# EAGLE board MainBoard 1.8.0 (EAGLE 9.6.2)
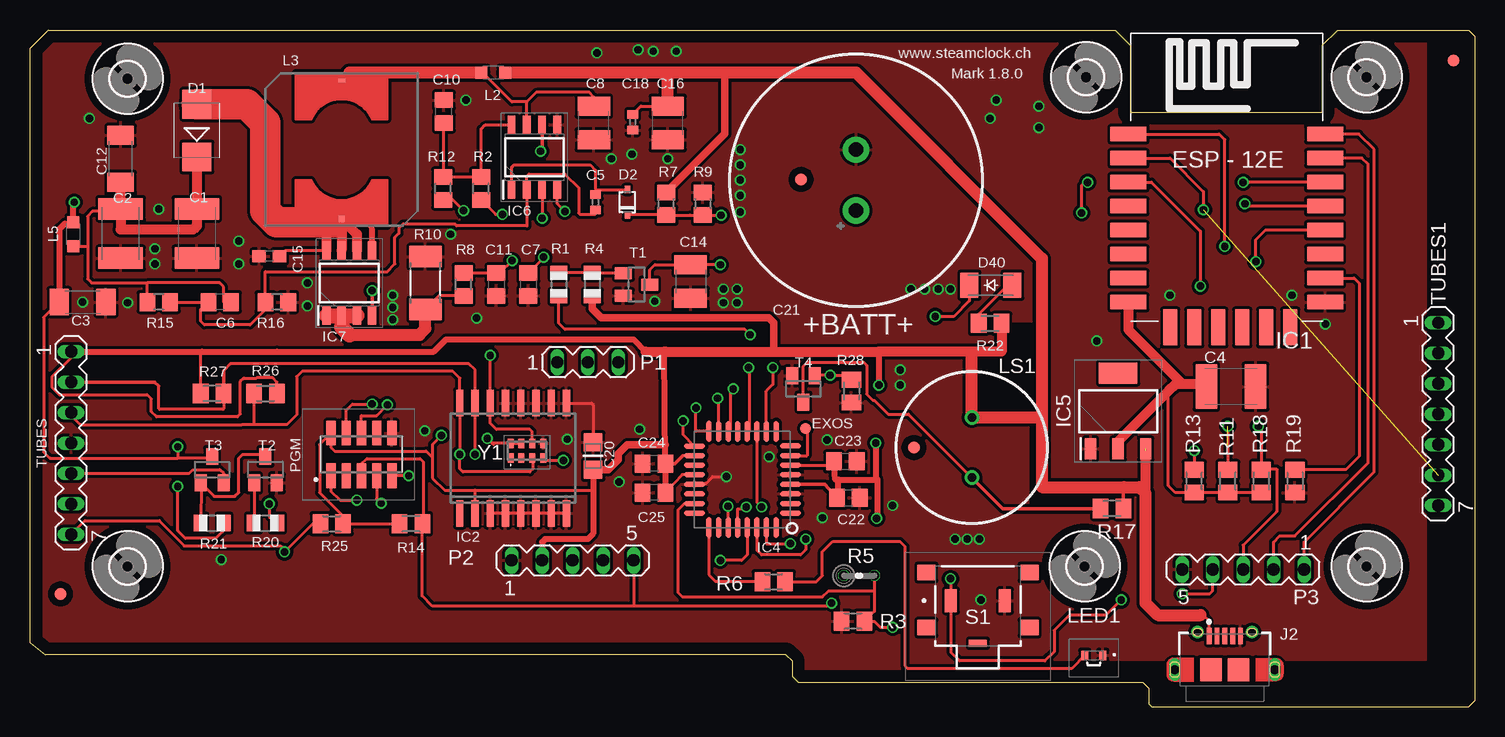
[diagram p0: board, top side]
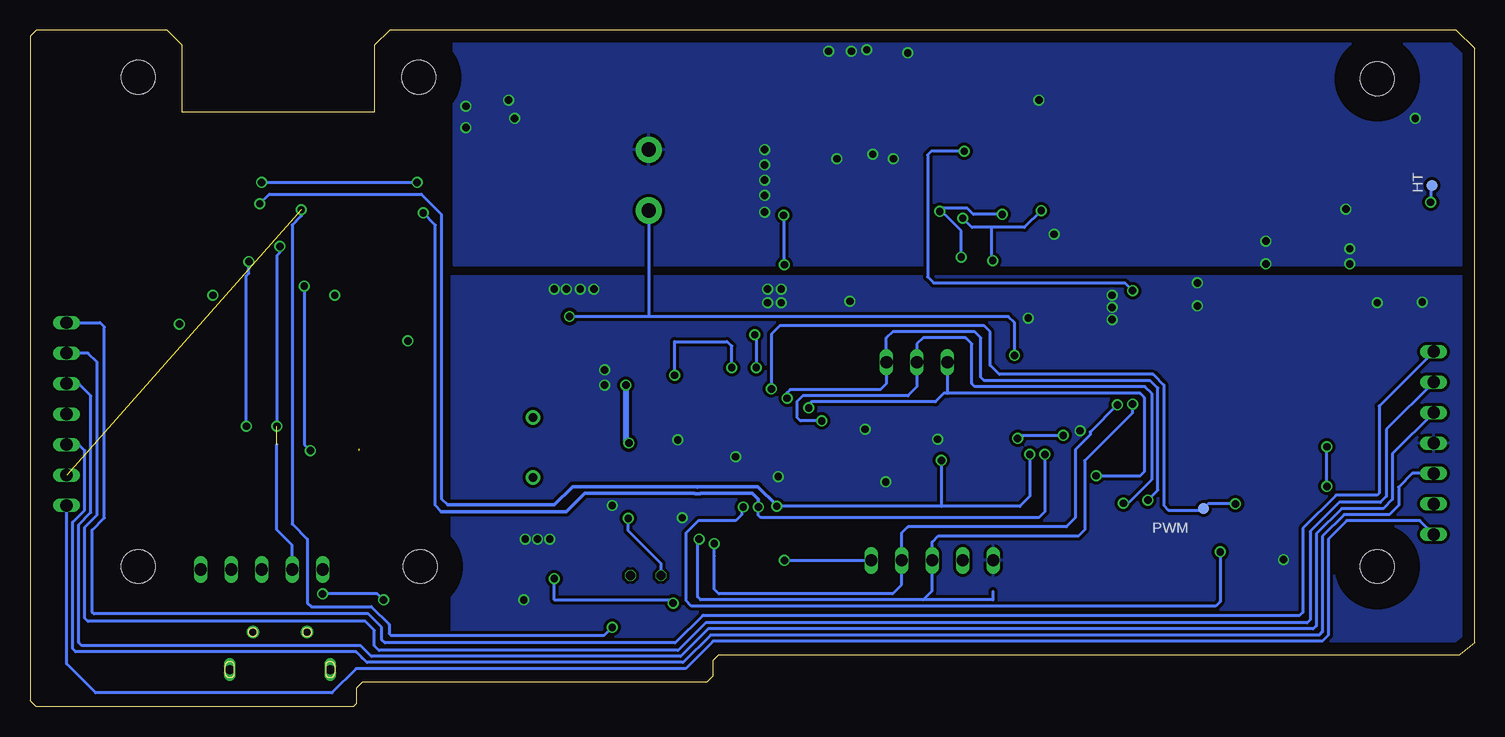
[diagram p1: board, bottom side, seen from below]

Size 120.4 x 56.39 mm. Coordinates in mm from the lower left corner, seen from the top.
Outline: 1.52,56.39 90.42,56.39 91.69,55.12 91.69,49.53 107.7,49.53 107.7,55.12 108.97,56.39 119.89,56.39 120.4,55.88 120.4,0.51 119.89,0 93.47,0 93.22,0.25 93.22,1.52 92.71,2.03 64.01,2.03 63.5,2.54 63.5,3.81 62.99,4.32 1.27,4.32 0,5.33 0,54.86 1.52,56.39
Copper layers (1*16): Top 0.035mm / dielectric 1.5mm / Bottom 0.035mm
Design rules "default *": minimum track width 10mil, minimum drill 24mil, track to track 4mil, track to pad 1mil, pad to pad 1mil, via to via 8mil, smd to smd 8mil, copper to edge 40mil, drill to drill 8mil, minimum pad ring 1mil, minimum via ring 3mil, stop-mask expansion 4mil, vias tented up to drill 0mil, thermal gap 10mil
Net classes: 0 default: width 0.254 mm, clearance 0.254 mm; 1 pwr: width 0.254 mm, clearance 0.356 mm

## Footprints (pad centres in the part's own frame; a part is rotated, then mirrored left to right if it is on the bottom)
C1812K = smd 1.8 x 3.7: 1 -2.05,0; 2 2.05,0
C1808 = smd 1.6 x 2.2: 1 -1.95,0; 2 1.95,0
C0402 = smd 0.7 x 0.9: 1 -0.65,0; 2 0.65,0
C0805 = smd 1.3 x 1.5: 1 -0.95,0; 2 0.95,0
C1210 = smd 1.6 x 2.7: 1 -1.4,0; 2 1.4,0
C0603 = smd 1.1 x 1: 1 -0.85,0; 2 0.85,0
CAP0805-NP = smd 1.524 x 1.524: 1 0,0; 2 2.286,0
ELNA21.5X8.0 = drill 1.2 pad 2.184: + -2.54,0; - 2.54,0
SMB = smd 2.4 x 2.4: A 2.2,0; C -2.2,0
SOD323 = smd 0.6 x 0.45: A 1.06,0; C -1.06,0
SOD-123_MINI-SMA = smd 1.5 x 2.1: A 1.8,0; C -1.8,0
TP09R = smd 0.9 x 0.9: TP 0,0
2,8 = hole 2.8: 0,0
ESP12E-SMD = smd 3 x 1.2: ADC -8.3,3.8; CH_PD -8.3,1.8; GND 8.1,-8.2; GPIO0 8.1,-2.2; GPIO2 8.1,-4.2; GPIO4 8.1,-0.2; GPIO5 8.1,1.8; GPIO12 -8.3,-4.2; GPIO13 -8.3,-6.2; GPIO14 -8.3,-2.2; GPIO15 8.1,-6.2; GPIO16 -8.3,-0.2; RESET -8.3,5.8; RXD0 8.1,3.8; TXD0 8.1,5.8; VCC -8.3,-8.2 | smd 1.2 x 3: CS0 -4.8,-10.3; GPIO9 -0.8,-10.3; GPIO10 1.2,-10.3; MISO -2.8,-10.3; MOSI 3.2,-10.3; SCLK 5.2,-10.3
SO16W = smd 0.6 x 2.2: 1 -4.445,-4.6; 2 -3.175,-4.6; 3 -1.905,-4.6; 4 -0.635,-4.6; 5 0.635,-4.6; 6 1.905,-4.6; 7 3.175,-4.6; 8 4.445,-4.6; 9 4.445,4.6; 10 3.175,4.6; 11 1.905,4.6; 12 0.635,4.6; 13 -0.635,4.6; 14 -1.905,4.6; 15 -3.175,4.6; 16 -4.445,4.6
QFP032 = smd 0.432 x 1.778: 1 0,0; 2 0.8,0; 3 1.599,0; 4 2.399,0; 5 3.199,0; 6 3.998,0; 7 4.798,0; 8 5.598,0; 17 5.588,8.001; 18 4.798,7.997; 19 3.998,7.997; 20 3.199,7.997; 21 2.399,7.997; 22 1.599,7.997; 23 0.799,7.997; 24 0,7.997 | smd 1.778 x 0.432: 9 6.807,1.194; 10 6.807,2.007; 11 6.807,2.794; 12 6.807,3.607; 13 6.807,4.394; 14 6.807,5.182; 15 6.807,5.994; 16 6.816,6.803; 25 -1.194,6.807; 26 -1.194,5.994; 27 -1.194,5.182; 28 -1.194,4.394; 29 -1.194,3.607; 30 -1.194,2.794; 31 -1.194,2.007; 32 -1.194,1.194
SOT230P700X180-4N = smd 1.75 x 0.95: 1 -3.15,2.3; 2 -3.15,0; 3 -3.15,-2.3 | smd 1.75 x 3.2: 4 3.15,0
SOIC127P600X175-8N = smd 1.525 x 0.65: 1 -2.712,1.905; 2 -2.712,0.635; 3 -2.712,-0.635; 4 -2.712,-1.905; 5 2.712,-1.905; 6 2.712,-0.635; 7 2.712,0.635; 8 2.712,1.905
SOIC127P600X175-8N' = smd 1.525 x 0.7: 1 -2.712,1.905; 2 -2.712,0.635; 3 -2.712,-0.635; 4 -2.712,-1.905; 5 2.712,-1.905; 6 2.712,-0.635; 7 2.712,0.635; 8 2.712,1.905
629105150921 = smd 0.4 x 1.35: 1 -1.3,2.335; 2 -0.65,2.335; 3 0,2.335; 4 0.65,2.335; 5 1.3,2.335 | drill 0.65 pad 1.05: S1 -2.26,2.65; S2 2.26,2.65 | drill 0.75 pad 0.95 long: S3 -4.175,-0.47; S6 4.175,-0.47 | smd 1.8 x 1.9: S4 -1.15,-0.47; S5 1.15,-0.47
L2012C = smd 1 x 1: 1 -1,0; 2 1,0
MSS7341 = smd 0.61 x 0.305: 1 0,5.765 | smd 0.5 x 0.5: 2 0,-5.765
SMLA15YTT86 = smd 0.6 x 0.8: 1 -0.75,-0.205; 2 0.75,-0.205
PKM13EPYH4002-B0 = drill 0.7 pad 1.2: 1 -2.5,0; 2 2.5,0
MA03-1 = drill 1.016 long: 1 -2.54,0; 2 0,0; 3 2.54,0
MA05-1 = drill 1.016 long: 1 -5.08,0; 2 -2.54,0; 3 0,0; 4 2.54,0; 5 5.08,0
2002132100010C4LF = smd 0.76 x 2.05: 1 2.54,1.775; 2 2.54,-1.775; 3 1.27,1.775; 4 1.27,-1.775; 5 0,1.775; 6 0,-1.775; 7 -1.27,1.775; 8 -1.27,-1.775; 9 -2.54,1.775; 10 -2.54,-1.775
R0805 = smd 1.1 x 1.4: 1 -1,0; 2 1,0
R0805' = smd 1.3 x 1.5: 1 -0.95,0; 2 0.95,0
M2012 = smd 1.3 x 1.6: 1 -0.95,0; 2 0.95,0
0204V = drill 0.813 octagon: 1 -1.27,0; 2 1.27,0
R2010 = smd 1.8 x 2.7: 1 -2.2,0; 2 2.2,0
M0805 = smd 1.3 x 1.6: 1 -0.95,0; 2 0.95,0
TL3336AF160Q = smd 1 x 1.9: 1 2.25,-0.45; 2 -2.25,-0.45 | smd 1.5 x 1.3: MP1 4.3,1.8; MP2 4.3,-2.8; MP3 -4.3,-2.8; MP4 -4.3,1.8 | smd 1.5 x 0.6: MP5 0,3.1
SOT23 = smd 1 x 1.4: 1 -0.95,-1.1; 2 0.95,-1.1; 3 0,1.1
MA07-1 = drill 1.016 long: 1 -7.62,0; 2 -5.08,0; 3 -2.54,0; 4 0,0; 5 2.54,0; 6 5.08,0; 7 7.62,0
FIDUCIAL_1MM = smd 1 x 1: 1 0,0
RV3028C732768KHZ1PPMTAQC = smd 0.5 x 0.8: 1 -1.35,-0.6; 2 -0.45,-0.6; 3 0.45,-0.6; 4 1.35,-0.6; 5 1.35,0.6; 6 0.45,0.6; 7 -0.45,0.6; 8 -1.35,0.6

## Placement (x,y rotation side)
C1  1uF  [C1812K]  13.91,39.43 270 top
C2  1uF  [C1812K]  7.56,39.43 270 top
C3  0.1uF  [C1808]  4.38,33.72 0 top
C4  100nF  [C1812K]  100.08,26.67 0 top
C5  220pF  [C0402]  47.12,42.04 270 top
C6  100pF  [C0805]  15.81,33.72 180 top
C7  430pF  [C0805]  41.53,35.18 270 top
C8  100uF  [C1210]  46.99,48.64 90 top
C10  100nF  [C0805]  34.48,49.59 90 top
C11  1nF  [C0805]  38.86,35.18 270 top
C12  0.1uF  [C1808]  7.56,45.66 90 top
C14  47uF  [C1210]  55.05,35.43 270 top
C15  560pF/250V  [C0603]  19.94,37.53 180 top
C16  100uF  [C1210]  53.15,48.64 90 top
C18  0.1uF  [C0402]  50.23,48.7 270 top
C20  0.1uF  [CAP0805-NP]  46.93,19.75 90 top
C21  0.33F  [ELNA21.5X8.0]  68.83,43.88 90 top
C22  100n  [C0805]  68.2,17.4 0 top
C23  100nF  [C0805]  67.95,20.45 0 top
C24  100nF  [C0805]  52.01,20.26 180 top
C25  100nF  [C0805]  52.01,17.84 180 top
D1  ES1D  [SMB]  13.91,48.01 90 top
D2  BAT54  [SOD323]  49.78,42.04 90 top
D40  CGRM4001-G  [SOD-123_MINI-SMA]  80.07,35.12 0 top
EXOS  PTR1TP09R  [TP09R]  64.64,23.18 0 top
H1  MOUNT-HOLE2.8  [2,8]  111.38,52.45 0 top
H2  MOUNT-HOLE2.8  [2,8]  111.38,11.68 0 top
H3  MOUNT-HOLE2.8  [2,8]  8.13,52.32 0 top
H4  MOUNT-HOLE2.8  [2,8]  8.13,11.68 0 top
H5  MOUNT-HOLE2.8  [2,8]  87.88,11.68 0 top
H6  MOUNT-HOLE2.8  [2,8]  88.01,52.45 0 top
HT  PTR1TP09R  [TP09R]  3.56,43.43 0 bottom
IC1  [ESP12E-SMD]  99.82,41.91 0 top
IC2  DS3231/SO  [SO16W]  40.26,20.7 0 top
IC4  ATMEGA328  [QFP032]  63.37,16.13 90 top
IC5  LM1117MP-3.3_NOPB  [SOT230P700X180-4N]  90.68,24.64 90 top
IC6  UCC3803DTR  [SOIC127P600X175-8N]  42.04,45.78 90 top
IC7  FDS2672  [SOIC127P600X175-8N']  26.61,35.31 90 top
J2  629105150921  [629105150921]  99.57,3.56 0 top
L2  60 Ohms @ 100MHz  [L2012C]  38.61,52.83 180 top
L3  33uH  [MSS7341]  25.97,46.42 0 top
L5  Ferrite  [L2012C]  3.62,39.37 90 top
LED1  SML-A15YTT86  [SMLA15YTT86]  88.65,4.06 180 top
LS1  PKM13EPYH4002-B0  [PKM13EPYH4002-B0]  78.49,21.59 270 top
P1  [MA03-1]  46.48,28.7 0 top
P2  [MA05-1]  45.21,12.19 0 top
P3  [MA05-1]  101.09,11.43 180 top
PGM  20021321-00010C4LF  [2002132100010C4LF]  27.62,21.02 180 top
PWM  PTR1TP09R  [TP09R]  22.61,16.51 0 bottom
R1  100k  [R0805]  44.07,35.18 270 top
R2  60k4  [R0805']  37.59,43.18 90 top
R3  10k  [M2012]  68.58,7.11 0 top
R4  100k  [R0805]  46.86,35.18 270 top
R5  15k  [0204V]  69.09,10.92 0 top
R6  1k  [M2012]  61.98,10.41 180 top
R7  2k  [R0805']  53.02,41.91 90 top
R8  1k  [R0805']  36.13,35.18 90 top
R9  100k  [R0805']  56.07,41.91 270 top
R10  0R1  [R2010]  32.96,35.31 90 top
R11  10k  [M0805]  99.82,18.8 270 top
R12  4.12k  [R0805']  34.42,43.18 90 top
R13  10k  [M0805]  97.03,18.8 270 top
R14  1k  [M2012]  31.75,15.24 0 top
R15  634k  [R0805']  10.73,33.72 180 top
R16  7.68k  [R0805']  20.57,33.72 180 top
R17  1k  [M2012]  90.17,16.51 0 top
R18  10k  [M0805]  102.62,18.8 270 top
R19  10k  [M0805]  105.41,18.8 90 top
R20  47k  [R0805]  19.62,15.3 0 top
R21  100k  [R0805]  15.18,15.3 0 top
R22  1k  [M2012]  80.01,31.94 180 top
R25  1k  [M2012]  25.15,15.24 180 top
R26  1k  [M2012]  19.62,26.1 180 top
R27  1k  [M2012]  15.18,26.1 0 top
R28  1k  [M2012]  68.45,26.29 90 top
S1  TL3336AF160Q  [TL3336AF160Q]  78.99,8.38 180 top
T1  MMBTA42  [SOT23]  50.55,35.18 270 top
T2  MMBTA42  [SOT23]  19.62,19.75 0 top
T3  MMBTA42  [SOT23]  15.18,19.75 0 top
T4  BSS123  [SOT23]  64.45,26.48 180 top
TUBES  [MA07-1]  3.43,21.97 270 top
TUBES1  [MA07-1]  117.35,24.38 270 top
U$4  FIDUCIAL  [FIDUCIAL_1MM]  2.54,9.4 0 top
U$5  FIDUCIAL  [FIDUCIAL_1MM]  73.66,21.59 0 top
U$20  FIDUCIAL  [FIDUCIAL_1MM]  64.26,43.94 0 top
U$36  FIDUCIAL  [FIDUCIAL_1MM]  118.62,53.85 0 top
Y1  RV-3028-C7_32.768KHZ_1PPM_TA_Q  [RV3028C732768KHZ1PPMTAQC]  41.4,21.34 0 top

## Library data of the parts
C1 C2 = rcl; MOUSER: 810-CGA8P3X7T2E105MA; PU: 1.07; SPICEPREFIX: C; TDK: C4532X7T2E105M250KE
C3 C12 = rcl; MOUSER: 581-1808PC104KAT1A; PU: 0.88; SPICEPREFIX: C
C4 R11 R13 R18 R19 = resistor
C5 = rcl; MOUSER: 963-LMK042B7221KC-W; SPICEPREFIX: C
C6 = rcl; MOUSER: 81-GCM21A5C2E101JX1D; PU: 0.319; SPICEPREFIX: C
C7 = rcl; MOUSER: 581-08055A431JAT4A; PU: 0.23; SPICEPREFIX: C
C8 C16 = rcl; MOUSER: 963-EMK325ABJ107MM-P; SPICEPREFIX: C; TAIYO_YUDEN: EMK325ABJ107MM-P
C10 = rcl; MOUSER: 963-EMF212B7104KGHT; PU: 0.23; SPICEPREFIX: C
C11 = rcl; MOUSER: 710-885382207004; PU: 0.122; SPICEPREFIX: C
C14 = rcl; MOUSER: 963-EMK325BJ476MM-P; SPICEPREFIX: C
C15 = rcl; MOUSER: 80-C0603C561JAG; PU: 0.038; SPICEPREFIX: C
C18 = rcl; MOUSER: 963-LMF105B7104KVHF; PU: 0.676; SPICEPREFIX: C
C20 = MySMD
C21 = Elkos; MOUSER: 555-DBN-5R5D334T; PU: 2.46
C22-C25 = rcl; SPICEPREFIX: C
D1 = diode; MOUSER: 512-ES1DF
D2 = sp4020_11; MF: Littelfuse; MOUSER: 621-BAT54WS-F; MPN: SP4020-01FTG; OC_FARNELL: unknown; OC_NEWARK: 05X0400
D40 = diode; MOUSER: 863-NSR0320MW2T1G; PU: 0.22
EXOS HT PWM = testpad
H1-H6 = holes
IC1 = esp8266modules
IC2 = DS3231; AVAILABILITY: Unavailable; MF: Maxim Integrated; MOUSER: 700-DS3231SN#; MP: DS3231; PACKAGE: SOIC-16 Maxim Integrated; PRICE: None; PU: 9.50
IC4 = MySMD; PU: 1.40
IC5 = SamacSys_Parts; DESCRIPTION: Space saving 800-mA low-dropout linear regulator with internal current limit; HEIGHT: 1.8mm; MANUFACTURER_NAME: Texas Instruments; MANUFACTURER_PART_NUMBER: LM1117MP-3.3/NOPB; MOUSER_PART_NUMBER: 926-LM1117MP-3.3NOPB; MOUSER_PRICE-STOCK: https://www.mouser.co.uk/ProductDetail/Texas-Instruments/LM1117MP-33-NOPB?qs=X1J7HmVL2ZFn4x9DZ4T2hA%3D%3D
IC6 = UCC3803DTR; DESCRIPTION: Switching Controllers Low-Power BiCMOS Current-Mode PWM; HEIGHT: 1.75mm; MANUFACTURER_NAME: Texas Instruments; MANUFACTURER_PART_NUMBER: UCC3803DTR; MOUSER: 595-UCC3803D; MOUSER_PART_NUMBER: 595-UCC3803DTR; MOUSER_PRICE-STOCK: https://www.mouser.com/Search/Refine.aspx?Keyword=595-UCC3803DTR; PU: 3.05
IC7 = FDS2672; DESCRIPTION: FDS2672, N-channel MOSFET Transistor 3.9 A 200 V, 8-Pin SOIC; HEIGHT: 1.75mm; MANUFACTURER_NAME: Fairchild Semiconductor; MANUFACTURER_PART_NUMBER: FDS2672; MOUSER: 512-FDS2672; MOUSER_PART_NUMBER: 512-FDS2672; MOUSER_PRICE-STOCK: https://www.mouser.com/Search/Refine.aspx?Keyword=512-FDS2672; PU: 1.54; RS_PART_NUMBER: 6710481P; RS_PRICE-STOCK: http://uk.rs-online.com/web/p/products/6710481P
J2 = Wurth_Connectors_WR-USB; APPLICATION: Micro USB 2.0; DATASHEET-URL: https://www.we-online.com/catalog/datasheet/629105150921.pdf; GERDER: Receptacle; INTERFACE-TYPE: Type AB; IR1: 1.8A; MOUNT: SMT; MOUSER: 710-629105150921; PACKAGING: Tape and Reel; PART-NUMBER: 629105150921; PINS: 5; PU: 1.90; TYPE: Horizontal; WORKING-VOLTAGE: 30V(AC)
L2 L5 = rcl; MOUSER: 963-BKP2125HS600-T; SPICEPREFIX: L
L3 = STEAM-inductor-coilcraft; MOUSER: 710-784770330; PU: 2.55
LED1 = SamacSys_Parts; DESCRIPTION: Yellow 590nm LED Indication - Discrete 2.1V 2-SMD, No Lead; HEIGHT: 0.65mm; MANUFACTURER_NAME: ROHM Semiconductor; MANUFACTURER_PART_NUMBER: SML-A15YTT86; MOUSER: 755-SML-A15YTT86; PU: 0.25
LS1 = SamacSys_Parts; DESCRIPTION: Transducer piezo PCB 30Vpp 70dB 12.6mm Murata Buzzer; HEIGHT: mm; MANUFACTURER_NAME: Murata Electronics; MANUFACTURER_PART_NUMBER: PKM13EPYH4002-B0; MOUSER_PART_NUMBER: 81-PKM13EPYH4002-B0; MOUSER_PRICE-STOCK: https://www.mouser.co.uk/ProductDetail/Murata-Electronics/PKM13EPYH4002-B0?qs=flZjIlU0hx09jX8FupUNIw%3D%3D
P1-P3 TUBES TUBES1 = con-lstb; OC_FARNELL: unknown; OC_NEWARK: unknown
PGM = SamacSys_Parts; DESCRIPTION: Headers & Wire Housings 1.27x1.27mm BTB, Hdr Recept, SMT, 10 Pos; HEIGHT: 4.75mm; MANUFACTURER_NAME: Amphenol; MANUFACTURER_PART_NUMBER: 20021321-00010C4LF; MOUSER_PART_NUMBER: 649-202132100010C4LF; MOUSER_PRICE-STOCK: https://www.mouser.com/Search/Refine.aspx?Keyword=649-202132100010C4LF
R1 R4-R6 R14 R17 R20-R22 R25-R28 U$4 U$5 U$20 U$36 = adafruit
R2 = rcl; MOUSER: 603-RT0805FRE0760K4L; PU: 0.11; SPICEPREFIX: R
R3 R8 R9 = rcl; SPICEPREFIX: R
R7 = rcl; MOUSER: 754-RR1220P-202D; SPICEPREFIX: R; SUSUMU: RR1220P-202-D
R10 = adafruit; MOUSER: 603-PE2010FKE070R1L; PU: 0.7
R12 = rcl; KOASPEER: RN732ATTD4121F100; MOUSER: 660-RN732ATD4121F100; SPICEPREFIX: R
R15 = rcl; MOUSER: 71-CRCW0603-634K-E3; SPICEPREFIX: R; VISHAY: CRCW0603634KFKEA
R16 = rcl; MOUSER: 71-CRCW0805-7.68K-E3; PU: 0.09; SPICEPREFIX: R; VISHAY: CRCW08057K68FKEA
S1 = SamacSys_Parts; DESCRIPTION: Tactile Switches Tactile Switch SPST OFF-(ON) 50mA, 12VDC, Right Angle SMT; HEIGHT: 7.35mm; MANUFACTURER_NAME: E-Switch; MANUFACTURER_PART_NUMBER: TL3336AF160Q; MOUSER_PART_NUMBER: 612-TL3336AF160Q; MOUSER_PRICE-STOCK: https://www.mouser.co.uk/ProductDetail/E-Switch/TL3336AF160Q?qs=iLbezkQI%252Bshf0NMs3%252BGhxA%3D%3D
T1-T3 = transistor
T4 = transistor-small-signal; MOUSER: 726-BSS123NH6433; PU: 0.37
Y1 = SamacSys_Parts; DESCRIPTION: Real Time Clock 32.768kHz I2C Time Acc. 1ppm; HEIGHT: 0.8mm; MANUFACTURER_NAME: Micro Crystal AG; MANUFACTURER_PART_NUMBER: RV-3028-C7 32.768kHz 1ppm TA QC; MOUSER_PART_NUMBER: 428-203591-MG01; MOUSER_PRICE-STOCK: https://www.mouser.co.uk/ProductDetail/Micro-Crystal/RV-3028-C7-32768kHz-1ppm-TA-QC?qs=u16ybLDytRaU7ZFJl2AxfQ%3D%3D

## Nets
+3V3: C4.1 IC1.VCC IC5.2 R11.2 R13.2 R18.2
+5V [pwr]: C16.2 C18.1 C20.1 C22.1 C23.1 C24.1 C25.1 IC2.2 IC4.4 IC4.6 IC4.18 IC4.20 IC5.3 J2.1 L2.1 LS1.1 P2.2 PGM.2 R4.2 R5.1 R7.2 R14.1 R17.2 R22.1 R25.1 R26.1 R27.1 TUBES1.1 TUBES.1 Y1.7 Y1.8
BATT: C21.+ D40.C IC2.14 Y1.6
BUZ: IC4.10 R28.2 T4.1
COM: C1.2 C2.2 C3.2 C4.2 C7.2 C8.1 C10.2 C11.2 C12.2 C14.2 C15.2 C16.1 C18.2 C20.2 C21.- C22.2 C23.2 C24.2 C25.2 IC1.GND IC2.3 IC2.4 IC2.5 IC2.6 IC2.7 IC2.8 IC2.9 IC2.10 IC2.11 IC2.12 IC2.13 IC4.3 IC4.5 IC4.21 IC5.1 IC6.5 J2.5 LED1.1 P2.1 P3.5 PGM.10 R3.1 R9.1 R10.2 R16.1 R19.1 R28.1 S1.2 T1.2 T2.2 T4.2 TUBES1.4 TUBES.4 Y1.5
CS: C11.1 IC6.3 R8.2 R12.1
D+: J2.3
D-: J2.2
FB: C5.2 C6.2 IC6.2 R15.1 R16.2
GPIO0: IC1.GPIO0 P3.3 R18.1
HT: T3.2 TUBES1.5 TUBES.5
HT-ENABLE: IC4.12 R1.2
IRQ: IC4.11 R25.2 TUBES1.7 TUBES.7
LDR: IC1.ADC IC4.23 R3.2 R5.2 TUBES1.6
LED: IC4.25 R6.2
MISO: IC4.16 P1.1 PGM.9
MOSI: IC4.15 P1.3 PGM.1
N$1: LED1.2 R6.1
N$2: IC1.CH_PD R13.1
N$3: LS1.2 R17.1 T4.3
N$5: EXOS.TP IC4.7
N$6: C1.1 C2.1 C6.1 C12.1 D1.C L5.1 R15.2
N$7: R21.1 T2.3 T3.1
N$8: R1.1 R4.1 T1.1
N$9: C14.1 D2.C R7.1 R9.2 T1.3
N$10: C5.1 D2.A IC6.1
N$11: IC1.GPIO15 R19.2
N$12: IC7.1 IC7.2 IC7.3 R8.1 R10.1
N$14: C8.2 IC6.7 L2.2 L3.1
N$18: C15.1 D1.A IC7.5 IC7.6 IC7.7 IC7.8 L3.2
N$19: R20.1 T2.1
N$23: D40.A R22.2
OUT: IC6.6 IC7.4
PWM: IC4.14 PWM.TP R20.2
RAW_HT: C3.1 HT.TP L5.2 R21.2 T3.3
RC: C7.1 IC6.4 R2.1
REF: C10.1 IC6.8 R2.2 R12.2
RESET: IC1.RESET IC4.29 P2.5 P3.4 PGM.5 R11.1 R14.2 S1.1
RX: IC4.30 P2.3 PGM.4
RX3.3: IC1.RXD0 P3.2
SCK: IC4.17 P1.2 PGM.7
SCL: IC1.GPIO5 IC2.16 IC4.28 R26.2 TUBES1.3 TUBES.3 Y1.3
SDA: IC1.GPIO4 IC2.15 IC4.27 R27.2 TUBES1.2 TUBES.2 Y1.4
TX: IC4.31 P2.4 PGM.6
TX3.3: IC1.TXD0 P3.1

## Tracks (layer width: path | path; a pad name or v marks a point on that pad's centre or on a via)
+3V3
  Top 0.254: R18.2 R11.2 R13.2 95.44,17.85 94.87,18.41 94.87,26.29
  Top 0.813: IC5.2 90.68,22.1 94.87,26.29 95.5,26.92 96.01,26.92 | C4.1 97.77,26.92 96.01,26.92 | IC1.VCC 91.52,31.41 96.01,26.92
+5V  (via drill 0.61)  (1 unrouted)
  Top 0.254: C20.1 46.99,19.75 46.99,18.03 37.08,18.03 | IC4.20 54.34,19.33 C25.1 | 20.57,29.59 | R26.1 20.57,27.05 20.19,27.43 18.92,27.43 18.87,27.38 17.82,27.38 17.54,27.1 17.54,24.4 17.29,24.14 10.55,24.14 10.12,24.58 10.12,25.65 9.77,26.01 2.44,26.01 1.83,26.62 1.83,27.48 3.43,29.08 TUBES.1 | 14.35,29.59 14.23,29.47 R27.1 | IC4.18 54.42,20.93 | C24.1 52.94,21.84 52.86,29.49 52.96,29.59 | IC4.6 67.16,20.13 | R14.1 R25.1 26.1,15.88 24.14,17.83 24.14,21.85 PGM.2 25.08,21.59 25.09,21.59 25.39,21.29 33.02,21.29 33.53,20.78 | LS1.1 78.49,24.13 | 78.49,29.34 78.74,29.59 | J2.1 98.27,7.14 97.79,7.62 97.54,7.62 | 37.08,18.03 34.54,18.03 33.53,19.05 33.53,20.78 | IC2.2 37.08,18.03 | Y1.7 Y1.8 38.7,21.94 | 38.7,21.94 38.61,21.84 | 38.7,21.94 38.52,21.94 v38.1,22.35 | v34.29,22.61 33.53,21.84 33.53,20.78 | C18.1 50.92,50.04 C16.2
  Top 0.305: IC4.4 66.25,18.53 C22.1 | 67.16,20.13 C23.1 | C24.1 53.75,20.26 54.42,20.93 | R17.2 91.12,18.22 91.19,18.29
  Top 0.508: C25.1 C24.1 52.86,29.59 | TUBES.1 14.35,29.59 20.57,29.59 33.66,29.59 34.67,30.61 50.29,30.61 51.31,29.59 | 67.37,18.92 C22.1 | 70.74,29.59 v70.74,26.8 | v70.48,21.97 70.48,18.92 | 78.17,29.53 78.23,29.59 | 67.37,18.92 67.12,18.92 C23.1 | 67.37,18.92 70.48,18.92 | 70.48,18.92 70.61,18.92 70.61,15.69 v70.55,15.69 | C20.1 46.93,14.41 46.48,13.97 42.93,13.97 42.67,13.72 P2.2
  Top 0.61: R7.2 57.91,47.75 57.91,52.83 | 61.98,29.59 61.98,32 61.57,32.41 47.6,32.41 46.86,33.15 R4.2 | C20.1 48.2,19.75 49.02,20.57 49.02,21.08 49.78,21.84 52.94,21.84
  Top 0.813: R22.1 80.96,29.59 78.74,29.59 78.23,29.59 70.74,29.59 61.98,29.59 52.96,29.59 | 51.31,29.59 52.86,29.59 | 92.96,17.78 92.96,21.34
  Top 1.016: 78.49,24.13 78.49,29.34 | 97.54,7.62 93.98,7.62 92.96,8.64 92.96,17.78 92.46,18.29 91.19,18.29 84.33,18.29 84.33,24.13 | 84.33,24.13 84.33,37.34 68.83,52.83 57.91,52.83 53.34,52.83 | LS1.1 78.53,24.13 84.33,24.13 | 53.34,52.83 L2.1 | C16.2 53.15,52.64 53.34,52.83
  Bottom 0.254: v38.1,22.35 37.85,22.61 v34.29,22.61 | TUBES.1 7.98,25.04 7.98,17.78 8.13,17.63 11.55,17.63 14.33,14.85 14.33,7.87 | 14.33,7.87 14.33,7.85 | 14.33,7.87 14.61,7.59 64.24,7.59 | 64.26,7.62 64.24,7.59 | 64.24,7.59 64.35,7.59 66.64,5.31 90.81,5.31 91.08,5.59 91.08,6.6 92.2,7.72 115.06,7.72 115.21,7.87 115.21,14.71 114.2,15.73 114.2,31.65 114.55,32 TUBES1.1 | R5.1 67.82,11.94 68.07,12.19 68.2,12.32 70.55,14.67 v70.55,15.69
  Bottom 0.508: v70.74,26.8 70.74,22.23 v70.48,21.97
BATT  (via drill 0.61)
  Top 0.254: v38.35,29.27 IC2.14 38.35,23.62 38.86,23.11 41.66,23.11 41.85,22.92 Y1.6 | D40.C 78.27,33.82 76.96,32.51 v75.44,32.51
  Bottom 0.254: C21.+ 68.83,32.51 | 68.83,32.51 38.86,32.51 38.35,32 v38.35,29.27 | 68.83,32.51 v75.44,32.51
BUZ  (via drill 0.61)
  Top 0.254: IC4.10 61.37,26.31 61.91,26.86 v61.91,28.26 | v66.67,27.62 66.74,27.62 | v66.67,27.62 68.45,27.62 R28.2 | v66.67,27.62 65.45,27.62 T4.1
  Bottom 0.254: v66.67,27.62 66.67,30.42 62.29,30.42 61.91,30.04 v61.91,28.26
COM  (via drill 0.61)
  Top 0.254: IC2.8 IC2.7 IC2.6 IC2.5 IC2.4 IC2.3 | IC2.9 46.77,25.3 46.93,25.15 C20.2 | IC4.21 55.48,18.63 56.34,18.63 56.89,19.18 v58.04,19.18
  other vias: 15.94,12.26 4.95,49.02 17.4,36.89 10.41,36.89 4.38,33.72 10.73,41.47 10.41,38.16 17.4,38.8 23.11,35.31 23.11,33.4 30.23,33.27 30.23,32.26 50.67,54.74 47.24,54.48 59.18,46.42 59.18,42.61 59.18,43.88 59.18,41.21 35.05,39.37 37.21,32.38 51.94,54.61 59.18,45.15 30.23,34.29 53.85,54.61 44.77,22.29 49.09,18.73 48.45,45.66 53.15,45.66 50.17,46.04 52.07,33.78 36.32,50.55 66.04,15.75 57.78,34.8 73.41,34.8 76.71,34.8 58.93,34.8 57.78,33.66 58.93,33.66 78.11,13.97 77.09,13.97 50.8,23.11 8.13,33.66 75.69,34.8 74.55,34.8 107.95,31.88 95,34.29 66.42,22.23 72.52,26.8 72.52,28.07 79.12,13.97 61.59,20.83 32.89,22.99 71.88,16.76 80.01,49.02 84.07,50.04 105.16,34.29 88.9,30.48 84.07,48.26 80.52,50.55 79.25,8.89
  pour Top: -1.65,55.31 86.49,55.31 86.49,32.13 -1.65,32.13
  pour Bottom: 0.25,35.88 0.25,1.52 85.22,1.52 85.22,35.88
  pour Top: -3.87,35.24 -3.87,1.52 83.19,1.52 83.19,35.24
  pour Bottom: 85.09,55.31 85.09,36.83 -1.65,36.83 -1.65,55.31
  pour Top: 81.98,56.2 81.98,3.94 116.33,3.94 116.33,56.2
CS  (via drill 0.61)
  Top 0.254: R12.1 35.24,42.23 v36.13,41.34 | R8.2 C11.1 39.12,36.13 v40.17,37.17 | IC6.3 v42.67,40.7
  Bottom 0.254: v40.17,37.17 40.26,37.27 40.26,39.94 | v36.13,41.34 37.53,39.94 40.26,39.94 | 40.26,39.94 41.91,39.94 v42.67,40.7
FB
  Top 0.254: R15.1 C6.2 14.22,33.08 14.22,32.13 14.54,31.81 18.35,31.81 19.62,33.09 R16.2 19.62,36.26 29.78,36.26 30.42,36.89 30.42,39.12 30.73,39.43 30.73,39.88 31.06,40.21 35.4,40.21 35.54,40.07 41.4,40.07 IC6.2 41.4,44.21 41.57,44.39 44.58,44.39 45.72,43.24 45.72,41.15 45.85,41.02 47.1,41.02 C5.2
GPIO0  (via drill 0.61)
  Top 0.254: IC1.GPIO0 102.96,39.71 102.16,38.91 v102.16,37.08 | P3.3 101.09,13.46 103.89,16.26 103.89,19.81 102.68,19.81 R18.1 102.62,23.11 v102.36,23.37
  Bottom 0.254: v102.36,23.37 102.36,35.9 102.16,36.1 v102.16,37.08
HT
  Top 0.254: TUBES.5 13.27,19.43 13.57,19.73 15.79,19.73 15.81,19.75 16.13,19.43 T3.2
  Bottom 0.254: TUBES.5 5.21,19.43 6.35,18.29 6.35,16.76 7.11,16 10.88,16 12.7,14.18 12.7,6.22 12.95,5.97 63.68,5.97 65.96,3.68 92.33,3.68 92.71,4.06 93.22,4.57 116.59,4.57 116.84,4.83 116.84,15.38 115.85,16.38 115.85,21.31 115.82,21.34 116.33,21.84 TUBES1.5
HT-ENABLE  (via drill 0.61)
  Top 0.254: IC4.12 59.94,22.94 59.94,28.07 59.88,28.13 v59.88,28.26 | v60.01,30.99 59.56,31.43 44.58,31.43 44.07,31.94 R1.2
  Bottom 0.254: v60.01,30.99 59.88,30.86 v59.88,28.26
IRQ  (via drill 0.61)
  Top 0.254: R25.2 23.56,15.24 v21.21,12.89 21.21,13.08 20.89,13.4 12.83,13.4 12.83,13.44 10.78,15.49 4.57,15.49 TUBES.7 | IC4.11 60.58,17.02 v60.96,16.64
  Bottom 0.254: v60.96,16.64 61.09,16.51 61.09,16 61.59,15.49 64.71,15.49 65.72,14.48 65.72,8.83 65.28,8.38 21.59,8.38 21.21,8.76 v21.21,12.89 | TUBES.7 4.57,15.49 10.67,15.49 12.19,13.97 12.19,5.97 12.7,5.46 63.47,5.46 65.75,3.17 93.22,3.17 95.25,1.14 114.94,1.14 117.35,3.56 TUBES1.7
LDR  (via drill 0.61)  (1 unrouted)
  Top 0.254: IC4.23 54.53,16.93 53.98,16.38 53.98,9.52 54.36,9.14 66.04,9.14 66.55,9.65 70.36,9.65 | IC1.ADC 95.01,45.71 97.79,42.93 v97.79,41.4 | R5.2 70.36,9.65 | 70.36,9.65 70.36,7.94 R3.2 70.36,7.11 70.87,6.6 v71.88,6.6
  Bottom 0.254: v97.79,41.4 97.79,40.89 98.55,40.13 98.55,15.24 97.28,13.97 97.28,8.64 96.98,8.33 91.95,8.33 90.48,6.85 90.48,6.1 90.3,5.92 73.66,5.92 73.58,5.92 72.57,5.92 v71.88,6.6
LED
  Top 0.254: IC4.25 56.57,11 57.1,10.46 60.97,10.46 R6.2
MISO  (via drill 0.61)
  Top 0.254: v31.56,19.24 PGM.9 | IC4.16 55.5,22.95 v55.5,24.89
  Bottom 0.254: v55.5,24.89 55.5,25.21 55.31,25.4 44.96,25.4 44.26,26.1 43.94,26.1 | 43.94,26.1 27.88,26.1 27.56,25.78 27.56,19.56 27.88,19.24 v31.56,19.24 | P1.1 43.94,26.1
MOSI  (via drill 0.61)
  Top 0.254: PGM.1 25.08,17.97 25.84,17.21 v27.24,17.21 | IC4.15 57.4,22.96 57.4,25.59 v57.3,25.7
  Bottom 0.254: v27.24,17.21 26.42,18.03 26.42,26.54 27.05,27.18 40.89,27.18 41.15,27.43 41.15,30.73 41.66,31.24 48.51,31.24 49.02,30.73 P1.3 49.02,26.92 49.53,26.42 57.05,26.42 57.3,26.16 v57.3,25.7
N$1
  Top 0.254: LED1.2 86.8,3.17 73.15,3.17 72.9,3.43 72.9,13.35 72.48,13.77 66.9,13.77 66.04,12.91 66.04,10.92 65.53,10.41 R6.1
N$2  (via drill 0.61)
  Top 0.254: v97.54,35.05 97.54,39.62 93.45,43.71 IC1.CH_PD | v97.03,21.34 R13.1
  Bottom 0.254: v97.54,35.05 97.54,21.84 v97.03,21.34
N$3
  Top 0.254: T4.3 64.45,28.38 64.77,28.7 69.47,28.7 69.72,28.45 69.72,26.03 70.23,25.53 70.36,25.53 71.5,24.38 73.19,24.38 LS1.2
  Top 0.305: LS1.2 81.07,16.51 R17.1
N$5
  Top 0.254: IC4.7 64.77,20.93 64.77,23.05 EXOS.TP
N$6
  Top 0.254: C6.1 16.13,33.72 16.13,34.99 15.81,35.31 9.78,35.31 | R15.2 9.78,35.31 | 9.78,35.31 5.14,35.31 4.79,35.66 4.79,38.35 | 3.87,38.37 L5.1 4.78,38.37 4.79,38.35 | C2.1 7.35,41.27 5.21,41.27 4.79,40.86 4.79,38.35
  Top 0.813: D1.C C1.1 13.91,40.07 13.59,39.75 7.56,39.75 C2.1 C12.1
N$7
  Top 0.254: T2.3 19.45,21.02 17.72,21.02 17.4,20.7 17.4,17.84 17.08,17.53 15.35,17.53 T3.1 14.33,18.55 R21.1
N$8
  Top 0.254: T1.1 46.91,36.13 R4.1 R1.1
N$9  (via drill 0.61)
  Top 0.254: D2.C 53.01,40.98 R7.1 54.99,40.96 R9.2 57.47,40.96 57.53,40.89 v57.59,40.96 | T1.3 51.65,36.41 52.07,36.83 C14.1 v57.53,36.83
  Bottom 0.254: v57.59,40.96 57.59,36.89 v57.53,36.83
N$10
  Top 0.254: IC6.1 40.13,44.96 40.32,45.15 46.67,45.15 47.12,44.7 47.12,43.16 47.24,43.04 | D2.A 49.72,43.04 47.24,43.04 | 47.24,43.04 C5.1
N$11
  Top 0.254: 105.28,19.87 R19.2 109.66,19.75 110.77,20.85 110.77,35.28 110.34,35.71 IC1.GPIO15
N$12
  Top 0.254: R8.1 34.08,34.23 R10.1
  Top 1.016: 26.61,30.99 32.45,30.99 32.96,31.5 R10.1
  Top 1.27: IC7.1 IC7.2 | IC7.2 IC7.3 | 26.61,30.99 25.97,31.62 IC7.2
N$14
  Top 0.254: L2.2 37.72,52.83 40.15,50.4 41.4,50.4 IC6.7 41.4,50.42 42.17,51.18 46.61,51.18 46.99,50.8 C8.2 | 25.91,52.25 L3.1
  Top 0.61: 26.62,52.83 L3.1
  Top 1.016: L2.2 26.62,52.83
N$18
  Top 0.254: C15.1 21.28,38.02 IC7.8 | L3.2 25.7,40.39 25.34,40.39 25.97,39.75 | 24.7,39.75 25.07,39.75 L3.2 | L3.2 26.87,40.65 27.24,41.02 28.51,39.75
  Top 0.508: IC7.5 28.51,39.75
  Top 0.813: 25.97,39.75 IC7.7 | L3.2 27.24,39.38 IC7.6 | 24.7,39.75 IC7.8
  Top 2.54: D1.A 18.06,50.21 19.62,48.64 19.62,41.34 20.57,40.39 25.34,40.39
N$19
  Top 0.254: R20.1 18.67,15.4 T2.1
N$23
  Top 0.254: D40.A 81.47,35.12 79.06,32.7 R22.2
OUT  (via drill 0.61)
  Top 0.254: 28.51,34.35 v28.51,34.67
  Top 0.305: IC7.4 28.51,34.35 | IC6.6 42.67,46.42 v42.55,46.29
  Bottom 0.254: v28.51,34.67 29.15,35.31 45.08,35.31 45.59,35.81 45.59,45.97 45.28,46.29 v42.55,46.29
PWM  (via drill 0.61)
  Top 0.254: IC4.14 58.36,23.1 58.36,26.23 v58.61,26.48 | R20.2 19.94,15.84 v19.94,16.89
  Bottom 0.254: v19.94,16.89 22.23,16.89 PWM.TP 22.73,16.38 25.53,16.38 25.91,16.76 25.91,26.8 26.8,27.69 39.62,27.69 40.39,28.45 40.39,31.24 40.89,31.75 57.91,31.75 58.61,31.05 v58.61,26.48
RAW_HT  (via drill 0.61)
  Top 0.254: T3.3 15.03,20.7 12.32,20.7 | 3.56,41.91 v3.68,42.04 | R21.2 16.03,14.57 15.49,14.03 12.95,14.03 12.32,14.67 v12.32,18.35 | v12.32,21.65 12.32,20.7 | L5.2 3.53,40.28 2.92,40.28 | 12.32,20.7 1.65,20.7 1.14,21.21 1.14,32.43 C3.1
  Top 0.508: 2.92,40.28 2.43,39.79 C3.1 | L5.2 3.62,41.85 3.56,41.91
  Bottom 0.254: v12.32,18.35 v12.32,21.65 | HT.TP 3.68,43.43 v3.68,42.04
RC  (via drill 0.61)
  Top 0.254: R2.1 38.8,41.02 v39.37,41.02 | v44.58,41.27 43.94,41.91 IC6.4 | C7.1 42.8,37.4 v42.8,37.46
  Bottom 0.254: v39.37,41.02 41.78,41.02 42.3,41.54 44.31,41.54 v44.58,41.27 44.43,41.27 42.8,39.64 v42.8,37.46
REF
  Top 0.254: C10.1 34.42,48.58 R12.2 R2.2 37.59,48.13 37.91,48.45 40.13,48.45 IC6.8
RESET  (via drill 0.61)  (1 unrouted)
  Top 0.254: v57.53,12.19 59.31,12.19 59.77,12.65 IC4.29 | PGM.5 27.62,20.23 28.07,20.68 32.51,20.68 32.77,20.42 32.77,15.31 R14.2 32.77,15.17 32.67,15.08 32.67,9.24 33.53,8.38 50.29,8.38 | P2.5 50.29,8.38 | v66.8,8.64 66.55,8.38 50.29,8.38 | v76.71,10.67 76.74,10.63 S1.1 76.74,4.54 77.47,3.81 84.58,3.81 85.34,4.57 85.34,6.35 86.61,7.62 89.66,7.62 v90.93,8.89 | IC1.RESET 99.1,47.71 99.57,47.24 v99.57,38.35 | v99.82,23.37 R11.1 | v96.01,9.4 98.3,9.4 98.55,9.65 P3.4
  Bottom 0.254: v57.53,12.19 P2.5 | v66.8,8.64 67.06,8.89 76.71,8.89 v76.71,10.67 | v99.57,38.35 99.57,37.85 99.82,37.59 v99.82,23.37 | P3.4 98.55,13.46 99.82,14.73 99.82,21.84 | v90.93,8.89 91.44,9.4 v96.01,9.4
RX  (via drill 0.61)
  Top 0.254: v28.51,25.21 26.86,25.21 26.35,24.7 PGM.4 | IC4.30 60.58,13.03 60.96,12.65 64.21,12.65 64.64,13.08 v64.64,13.97
  Bottom 0.254: v28.51,25.21 28.51,24.51 32.51,20.51 32.51,14.73 33.02,14.22 44.7,14.22 45.21,13.72 P2.3 45.21,9.65 45.97,8.89 | 45.97,8.89 40.13,8.89 40.13,9.58 | 45.97,8.89 64.52,8.89 64.77,9.14 64.77,13.84 v64.64,13.97
RX3.3
  Top 0.254: P3.2 103.63,13.72 104.14,14.22 105.41,14.22 111.51,20.32 111.51,45.21 111,45.72 107.93,45.72 IC1.RXD0
SCK  (via drill 0.61)
  Top 0.254: v29.27,16.95 28.89,17.34 PGM.7 | IC4.17 54.42,22.67 v54.42,23.81
  Bottom 0.254: v54.42,23.81 56.19,23.81 56.45,24.07 56.45,25.46 56.01,25.91 47.24,25.91 46.48,26.67 P1.2 46.48,30.23 45.97,30.73 42.42,30.73 41.91,30.23 41.91,26.92 41.66,26.67 27.5,26.67 26.92,26.1 26.92,18.92 28.89,16.95 v29.27,16.95
SCL  (via drill 0.61)
  Top 0.254: TUBES.3 3.43,24.26 4.19,23.49 17.65,23.49 17.66,23.5 18.67,23.5 | 18.67,23.5 R26.2 | IC4.28 58.98,16.46 59.69,16.46 v59.69,16.64 | 18.67,23.5 21.4,23.5 22.23,24.32 22.23,27.49 22.67,27.94 35.24,27.94 35.81,27.37 IC2.16 v35.81,21.02 35.81,19.81 36.07,19.56 41.66,19.56 41.91,19.81 41.91,20.68 Y1.3 | IC1.GPIO5 101.62,43.71 101.6,43.69 v101.09,43.69 | v87.63,41.15 87.63,43.43 87.88,43.69 v88.14,43.69
  Bottom 0.254: v59.69,16.64 59.69,15.94 59.5,15.75 36.32,15.75 35.81,16.26 v35.81,21.02 | TUBES.3 6.86,21.08 6.86,17.27 7.62,16.51 11.09,16.51 13.21,14.39 13.21,6.73 13.46,6.48 63.89,6.48 66.17,4.19 91.95,4.19 92.84,5.08 116.08,5.08 116.33,5.33 116.33,15.17 115.32,16.19 115.32,25.91 116.33,26.92 TUBES1.3 | v101.09,43.69 v88.14,43.69 | 86.11,16.26 86.61,16.76 86.61,40.13 v87.63,41.15
  Bottom 0.305: v59.69,16.64 59.69,17.27 60.2,17.78 64.52,17.78 64.55,17.74 65.02,17.74 65.05,17.78 74.17,17.78 75.69,16.26 86.11,16.26
SDA  (via drill 0.61)
  Top 0.254: R27.2 16.13,24.83 16.06,24.77 10.79,24.77 10.73,24.83 10.73,26.73 10.41,27.05 | IC4.27 58.19,16.67 v58.17,16.7 | v37.08,21.02 IC2.15 37.08,28.07 36.58,28.58 16.7,28.58 16.13,28 | Y1.4 42.97,20.52 v44.45,20.52 | IC1.GPIO4 101.44,41.71 v101.24,41.91
  Top 0.305: R27.2 16.13,28 | 10.41,27.05 TUBES.2
  Bottom 0.254: 44.45,20.32 v44.45,20.52 44.45,16.7 | v37.08,21.02 37.08,17.53 37.91,16.7 44.45,16.7 | 44.45,16.7 v58.17,16.7 | TUBES.2 7.37,23.11 7.37,17.53 7.87,17.02 11.3,17.02 13.72,14.6 13.72,7.24 13.97,6.98 64.1,6.98 66.38,4.7 91.31,4.7 91.69,5.08 91.69,6.35 92.46,7.11 115.57,7.11 115.82,7.37 115.82,14.96 114.81,15.98 114.81,28.7 115.57,29.46 TUBES1.2 | v101.24,41.91 100.44,42.71 87.78,42.71 86.11,41.03 86.11,17.32 85.6,16.81
  Bottom 0.305: v58.17,16.7 58.17,16.76 59.74,18.34 64.75,18.34 | 64.78,18.3 64.75,18.34 | 64.75,18.34 75.18,18.34 76.71,16.81 85.6,16.81
TX  (via drill 0.61)
  Top 0.254: PGM.6 27.62,24.26 28.89,24.26 v29.78,25.15 | IC4.31 61.37,13.59 v63.37,13.59
  Bottom 0.254: v29.78,25.15 32.06,22.87 32.06,22.64 33.27,21.42 33.27,15.75 34.04,14.99 47.24,14.99 47.75,14.48 P2.4 47.75,10.16 48.51,9.4 62.99,9.4 63.37,9.78 v63.37,13.59 63.37,12.57
TX3.3
  Top 0.254: P3.1 106.17,13.72 112.01,19.56 112.01,46.44 110.74,47.71 IC1.TXD0

## Text on the board
tNames: www.steamclock.ch | Mark 1.8.0 | +BATT+